# EAGLE board HAP-4xJalousieaktor-1.0 (EAGLE 5.06)
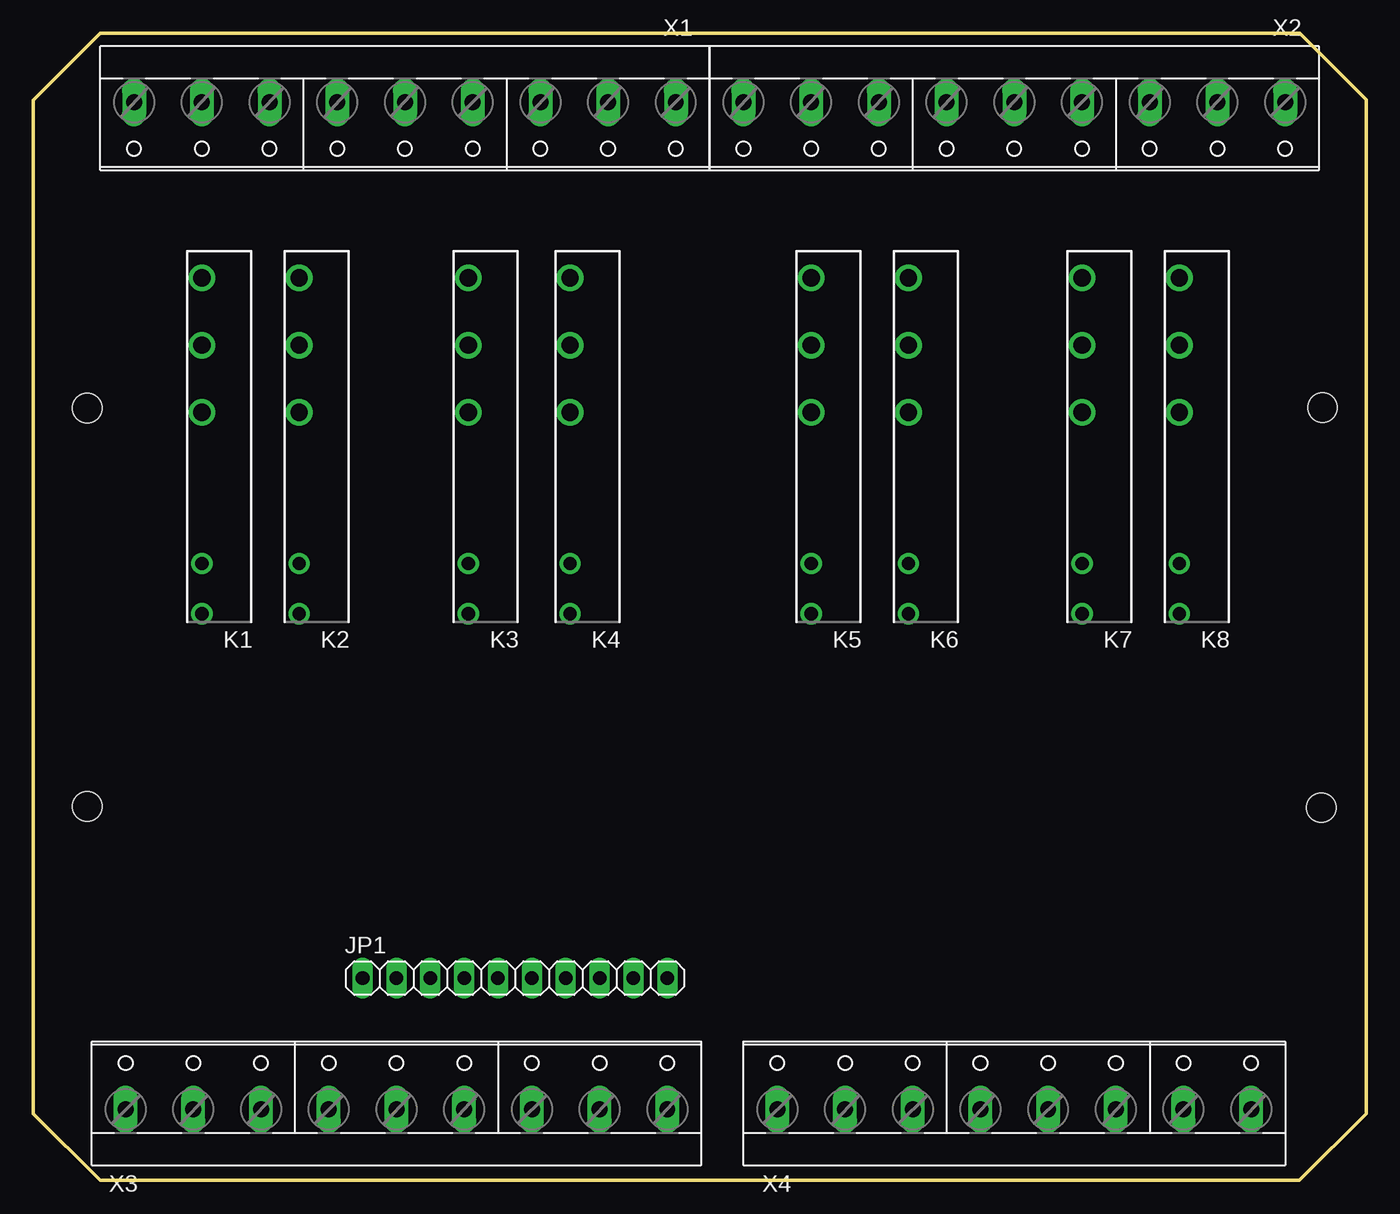
[diagram p0: board, top side]
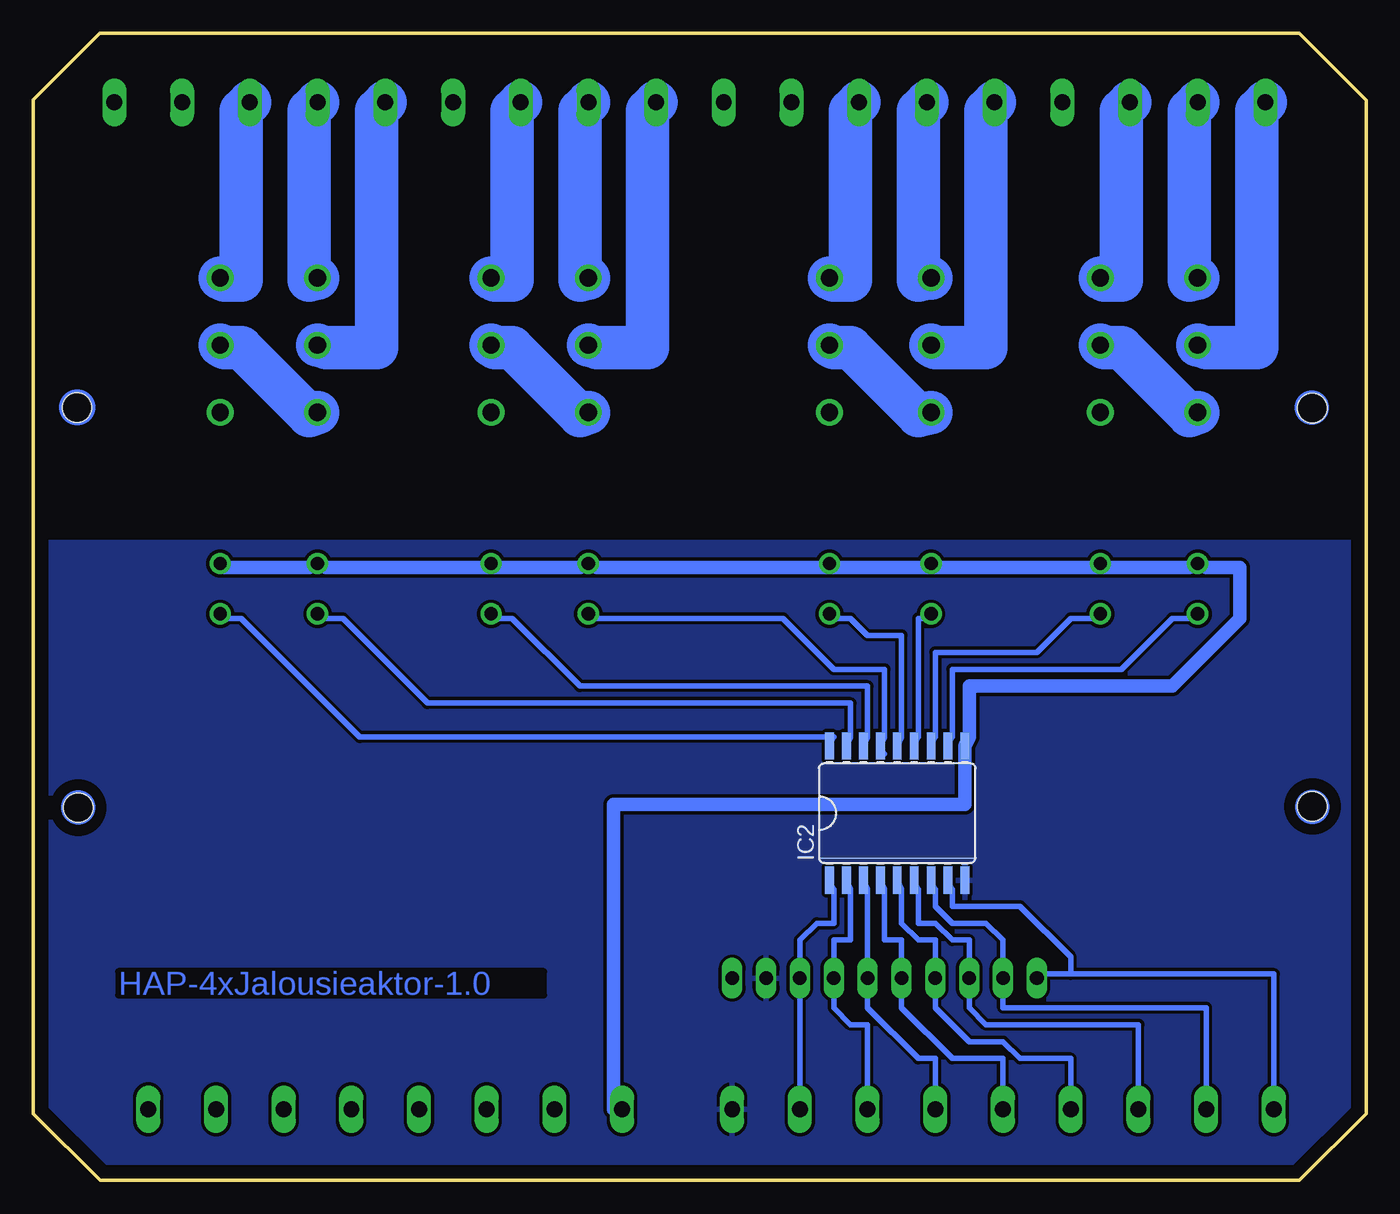
[diagram p1: board, bottom side, seen from below]

Size 100.01 x 86.08 mm. Coordinates in mm from the lower left corner, seen from the top.
Outline: 100.01,5.01 100.01,81.08 95.01,86.08 5.01,86.08 0,81.07 0.01,5 5.01,0 95,0 100,5
Copper layers (1*16): Top 0.035mm / dielectric 1.5mm / Bottom 0.035mm
Design rules "default": minimum track width 10mil, minimum drill 24mil, track to track 8mil, track to pad 12mil, pad to pad 8mil, via to via 8mil, smd to smd 8mil, copper to edge 40mil, drill to drill 8mil, minimum pad ring 10mil, minimum via ring 8mil, stop-mask expansion 4mil, vias tented up to drill 0mil, thermal gap 10mil
Net classes: 0 default: width 0.406 mm, clearance 0.102 mm; 1 Mains: width 3.251 mm, clearance 0.762 mm; 2 Medium: width 1.016 mm, clearance 0.254 mm
Holes 2.2 mm at 4.04,28.07 96.64,27.97 4.04,57.96 96.74,58

## Footprints (pad centres in the part's own frame; a part is rotated, then mirrored left to right if it is on the bottom)
SO18W = smd 0.66 x 2.032: 1 -5.08,-5.029; 2 -3.81,-5.029; 3 -2.54,-5.029; 4 -1.27,-5.029; 5 0,-5.029; 6 1.27,-5.029; 7 2.54,-5.029; 8 3.81,-5.029; 9 5.08,-5.029; 10 5.08,5.029; 11 3.81,5.029; 12 2.54,5.029; 13 1.27,5.029; 14 0,5.029; 15 -1.27,5.029; 16 -2.54,5.029; 17 -3.81,5.029; 18 -5.08,5.029
1X10 = drill 1.016 long: 1 -11.43,0; 2 -8.89,0; 3 -6.35,0; 4 -3.81,0; 5 -1.27,0; 6 1.27,0; 7 3.81,0; 8 6.35,0; 9 8.89,0; 10 11.43,0
FTR-LYC = drill 1 pad 1.6 round: 1 -3.78,0; 2 0,0 | drill 1.3 pad 2 round: 3 11.34,0; 4 16.38,0; 5 21.42,0
W237-9P = drill 1.194 long: 1 -20.32,-0.635; 2 -15.24,-0.635; 3 -10.16,-0.635; 4 -5.08,-0.635; 5 0,-0.635; 6 5.08,-0.635; 7 10.16,-0.635; 8 15.24,-0.635; 9 20.32,-0.635
W237-8P = drill 1.194 long: 1 -17.78,-0.635; 2 -12.7,-0.635; 3 -7.62,-0.635; 4 -2.54,-0.635; 5 2.54,-0.635; 6 7.62,-0.635; 7 12.7,-0.635; 8 17.78,-0.635

## Placement (x,y rotation side)
IC2  [SO18W]  35.19,27.57 0 bottom
JP1  [1X10]  36.14,15.18 0 top
K1  FTR-LYC12  [FTR-LYC]  12.64,46.3 90 top
K2  FTR-LYC12  [FTR-LYC]  19.95,46.3 90 top
K3  FTR-LYC12  [FTR-LYC]  32.65,46.3 90 top
K4  FTR-LYC12  [FTR-LYC]  40.27,46.3 90 top
K5  FTR-LYC12  [FTR-LYC]  58.37,46.3 90 top
K6  FTR-LYC12  [FTR-LYC]  65.67,46.3 90 top
K7  FTR-LYC12  [FTR-LYC]  78.69,46.3 90 top
K8  FTR-LYC12  [FTR-LYC]  85.99,46.3 90 top
X1  [W237-9P]  27.88,80.27 180 top
X2  [W237-9P]  73.61,80.27 180 top
X3  [W237-9P]  27.25,5.98 0 top
X4  [W237-8P]  73.61,5.98 0 top

## Library data of the parts
IC2 = uln-udn
JP1 = pinhead
K1-K8 = relay
X1-X4 = con-wago-508

## Nets
GND [Medium]: IC2.9 JP1.9 X3.9
I1: IC2.8 JP1.1 X3.1
I2: IC2.7 JP1.2 X3.2
I3: IC2.6 JP1.3 X3.3
I4: IC2.5 JP1.4 X3.4
I5: IC2.4 JP1.5 X3.5
I6: IC2.3 JP1.6 X3.6
I7: IC2.2 JP1.7 X3.7
I8: IC2.1 JP1.8 X3.8
N$1 [Mains]: K7.5 X2.4
N$2 [Mains]: K1.5 X1.8
N$3 [Mains]: K1.3 K2.4
N$4 [Mains]: K3.5 X1.4
N$5 [Mains]: K2.5 X1.7
N$6 [Mains]: K4.5 X1.3
N$7 [Mains]: K3.3 K4.4
N$8 [Mains]: K3.4 X1.5
N$9 [Mains]: K5.4 X2.9
N$10 [Mains]: K5.5 X2.8
N$11 [Mains]: K5.3 K6.4
N$12 [Mains]: K6.5 X2.7
N$13 [Mains]: K1.4 X1.9
N$14 [Mains]: K7.4 X2.5
N$15 [Mains]: K8.5 X2.3
N$16 [Mains]: K7.3 K8.4
O1: IC2.11 K1.1
O2: IC2.12 K2.1
O3: IC2.13 K3.1
O4: IC2.14 K4.1
O5: IC2.15 K5.1
O6: IC2.16 K6.1
O7: IC2.17 K7.1
O8: IC2.18 K8.1
VCCSUPPLY [Medium]: IC2.10 K1.2 K2.2 K3.2 K4.2 K5.2 K6.2 K7.2 K8.2 X4.1

## Tracks (layer width: path | path; a pad name or v marks a point on that pad's centre or on a via)
GND
  pour Bottom: -0.05,47.88 99.96,47.88 99.96,5.02 95.2,0.26 5.34,0.26 5.03,-0.06 -0.05,5.02
I1
  Bottom 0.406: 22.17,15.5 22.17,16.77 25.98,20.58 31.06,20.58 31.06,21.85 IC2.8 | 22.17,15.5 24.71,15.5 JP1.1 | X3.1 6.93,15.5 22.17,15.5
I2
  Bottom 0.406: IC2.7 32.33,21.85 32.33,20.58 31.06,19.31 28.52,19.31 27.25,18.04 JP1.2 27.25,12.96 12.01,12.96 X3.2
I3
  Bottom 0.406: IC2.6 33.6,21.85 33.6,19.31 32.33,19.31 31.06,18.04 29.79,18.04 JP1.3 29.79,12.96 28.52,11.69 17.09,11.69 X3.3
I4
  Bottom 0.406: IC2.5 34.87,21.85 34.87,19.31 33.6,18.04 32.33,18.04 JP1.4 32.33,12.96 29.79,10.42 27.25,10.42 25.98,9.15 22.17,9.15 X3.4
I5
  Bottom 0.406: IC2.4 36.14,21.85 36.14,18.04 34.87,18.04 JP1.5 34.87,12.96 31.06,9.15 27.25,9.15 X3.5
I6
  Bottom 0.406: IC2.3 37.41,21.85 JP1.6 37.41,12.96 33.6,9.15 32.33,9.15 X3.6
I7
  Bottom 0.406: IC2.2 38.68,21.85 38.68,18.04 39.95,18.04 JP1.7 39.95,12.96 38.68,11.69 37.41,11.69 X3.7
I8
  Bottom 0.406: IC2.1 39.95,21.85 39.95,19.31 41.22,19.31 42.49,18.04 JP1.8 X3.8
N$1
  Bottom 3.251: X2.4 79.32,80.27 79.32,67.57 K7.5
N$2
  Bottom 3.251: X1.8 13.28,80.27 13.28,67.57 K1.5
N$3
  Bottom 3.251: K1.3 13.28,57.41 18.36,62.49 19.63,62.49 K2.4
N$4
  Bottom 3.251: X1.4 33.6,80.27 33.6,67.57 K3.5
N$5
  Bottom 3.251: X1.7 18.36,80.27 18.36,67.57 19.63,67.57 K2.5
N$6
  Bottom 3.251: X1.3 38.68,80.27 38.68,67.57 39.95,67.57 K4.5
N$7
  Bottom 3.251: K3.3 33.6,57.41 38.68,62.49 39.95,62.49 K4.4
N$8
  Bottom 3.251: X1.5 28.52,80.27 28.52,62.49 32.33,62.49 K3.4
N$9
  Bottom 3.251: X2.9 53.92,80.27 53.92,62.49 57.73,62.49 K5.4
N$10
  Bottom 3.251: X2.8 59,80.27 59,67.57 K5.5
N$11
  Bottom 3.251: K5.3 59,57.41 64.08,62.49 65.35,62.49 K6.4
N$12
  Bottom 3.251: X2.7 64.08,80.27 64.08,67.57 65.35,67.57 K6.5
N$13
  Bottom 3.251: X1.9 8.2,80.27 8.2,62.49 12.01,62.49 K1.4
N$14
  Bottom 3.251: X2.5 74.24,80.27 74.24,62.49 78.05,62.49 K7.4
N$15
  Bottom 3.251: X2.3 84.4,80.27 84.4,67.57 85.67,67.57 K8.5
N$16
  Bottom 3.251: K7.3 79.32,57.41 84.4,62.49 85.67,62.49 K8.4
O1
  Bottom 0.406: IC2.11 31.06,33.28 31.06,38.36 18.36,38.36 14.55,42.17 13.28,42.17 K1.1
O2
  Bottom 0.406: IC2.12 32.33,33.28 32.33,39.63 24.71,39.63 22.17,42.17 19.63,42.17 K2.1
O3
  Bottom 0.406: IC2.13 33.6,33.28 33.6,42.17 32.33,42.17 K3.1
O4
  Bottom 0.406: IC2.14 34.87,33.28 34.87,40.9 37.41,40.9 38.68,42.17 39.95,42.17 K4.1
O5
  Bottom 0.406: 36.14,32.01 IC2.15 36.14,33.28 36.14,38.36 39.95,38.36 43.76,42.17 57.73,42.17 K5.1
O6
  Bottom 0.406: IC2.16 37.41,33.28 37.41,37.09 59,37.09 64.08,42.17 65.35,42.17 K6.1
O7
  Bottom 0.406: IC2.17 38.68,33.28 38.68,35.82 70.43,35.82 76.78,42.17 78.05,42.17 K7.1
O8
  Bottom 0.406: IC2.18 39.95,33.28 75.51,33.28 84.4,42.17 85.67,42.17 K8.1
VCCSUPPLY
  Bottom 1.016: 65.35,45.98 59,45.98 K5.2 57.73,45.98 39.95,45.98 | K8.2 85.67,45.98 79.32,45.98 K7.2 78.05,45.98 65.35,45.98 | 65.35,45.98 K6.2 | 32.33,45.98 39.95,45.98 | 19.63,45.98 13.28,45.98 K1.2 12.01,45.98 9.47,45.98 9.47,42.17 14.55,37.09 29.79,37.09 29.79,33.28 IC2.10 30.11,28.2 56.46,28.2 56.46,5.34 X4.1 | 19.63,45.98 32.33,45.98 | 32.33,45.98 K3.2 | 19.63,45.98 K2.2 | 39.95,45.98 K4.2
(copper drawn outside any net)
  shapes: Bottom circle x4

## Text on the board
Bottom: HAP-4xJalousieaktor-1.0